# EAGLE board 6hp_2J1P_PULP_panel (EAGLE 6.6.0)

No outline drawn. Coordinates in mm, seen from the top.
Copper layers (1*16): Top 0.035mm / dielectric 1.5mm / Bottom 0.035mm
Design rules "PatternAgents_7mil": minimum track width 7mil, minimum drill 14mil, track to track 7mil, track to pad 7mil, pad to pad 7mil, via to via 7mil, smd to smd 7mil, copper to edge 7mil, drill to drill 7mil, minimum pad ring 12mil, minimum via ring 10mil, stop-mask expansion 4mil, vias tented up to drill 25mil, thermal gap 7mil
Holes 3.17 mm at 5.08,40.18 5.08,3 25.4,40.18 25.4,3
Holes 6.22 mm at 22.23,29.97 8.64,29.97
Holes 9.65 mm at 15.24,13.08

## Placement (x,y rotation side)
U$48  BY_CC_SA_TEXTTEXT  [BY_CC_SA_TEXT]  21.08,-7.62 0 top

## Library data of the parts
U$48 = PatternAgents-Logos

## Text on the board
tDocu: Tom Moxon